# Altium PCB PCB.PcbDoc
Units mm, origin at the board's own origin, x right, y up, seen from the top; angles counter-clockwise.
Board outline 96 x 46 mm, 2 copper layers (Top Layer, Bottom Layer); 22 components, 41 nets, 144 pads, 3 vias.
Unrouted connection lines stored in the file: 2.
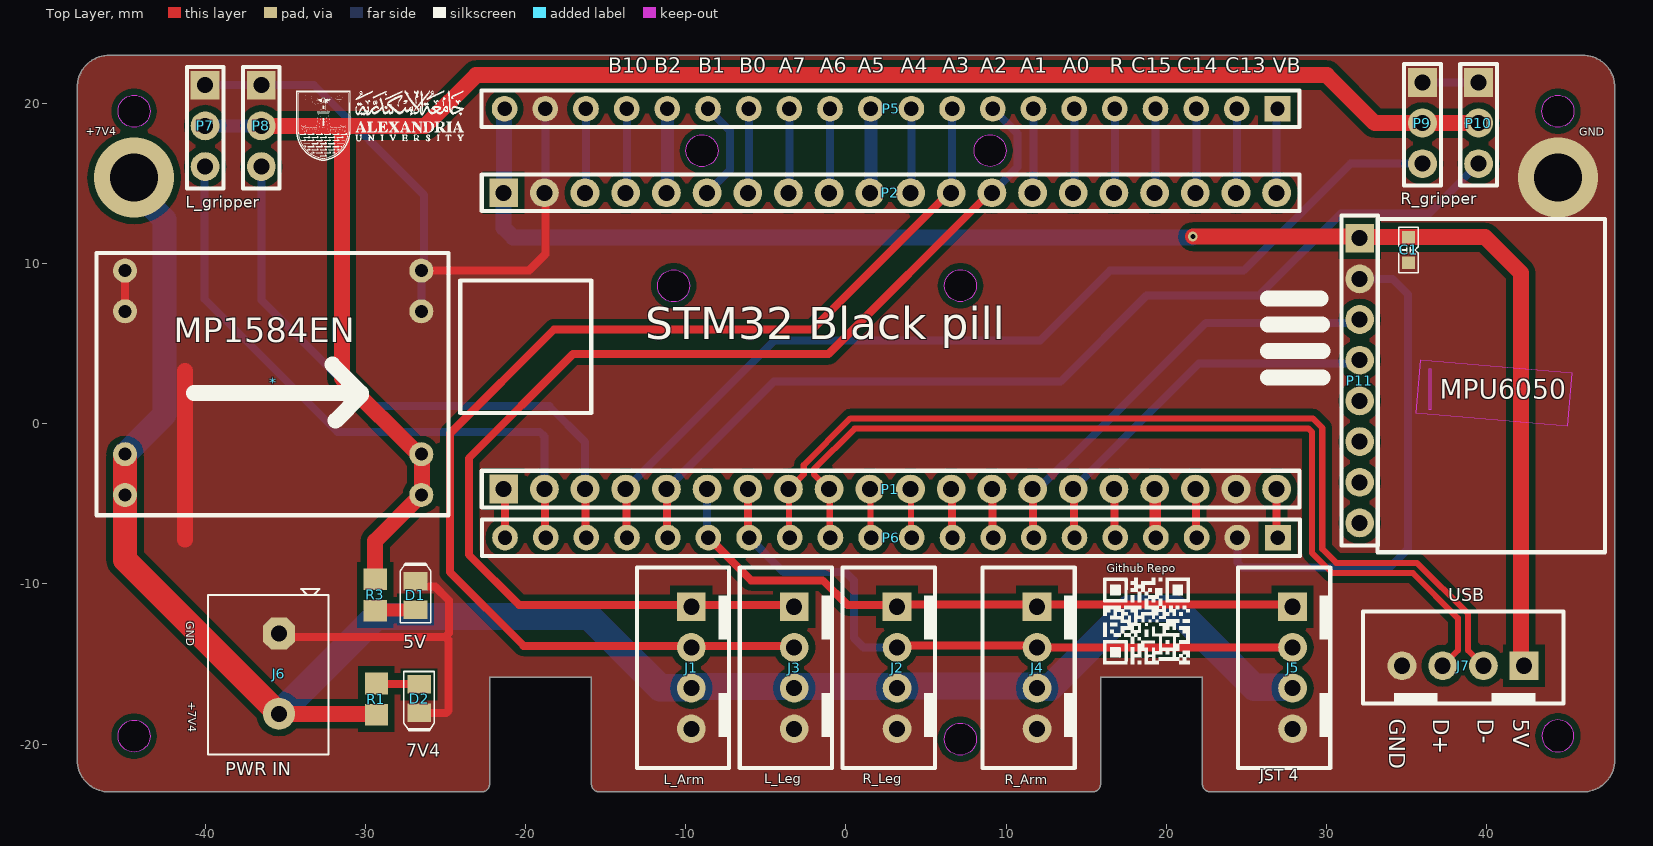
[diagram p0: Top Layer view]
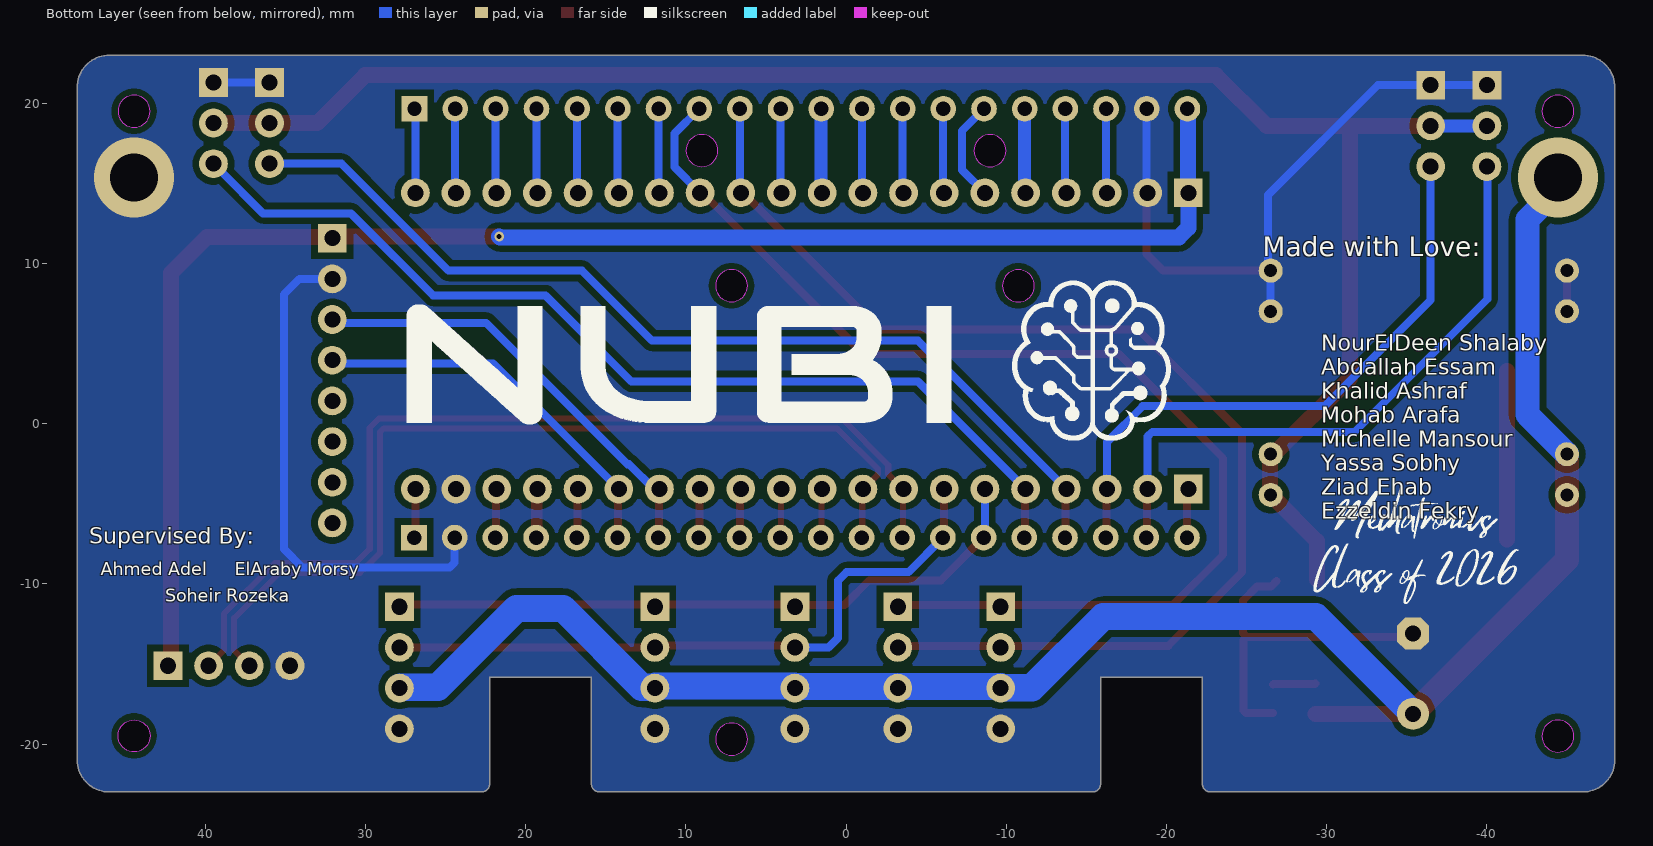
[diagram p1: Bottom Layer view, seen from below]
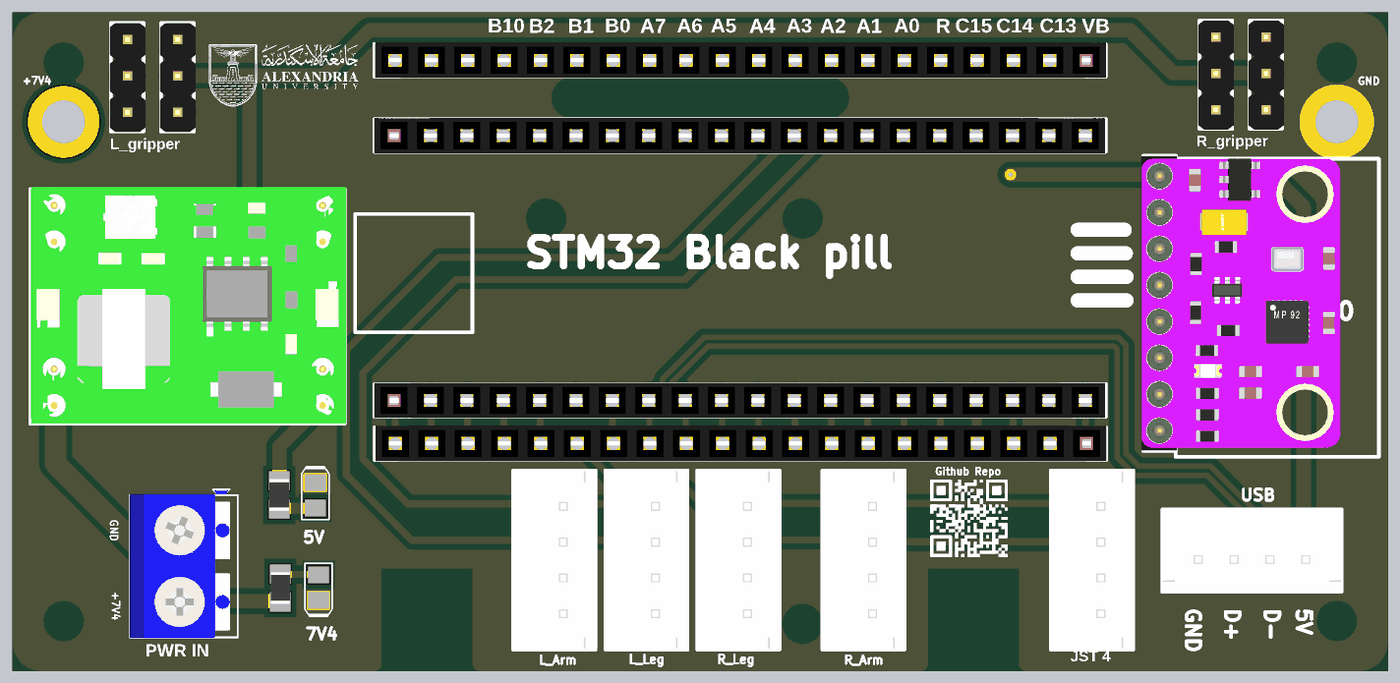
[diagram p2: 3D render of the assembled board from above, using the file's embedded part models]

## Layer stack, top to bottom
Top Solder: solder mask 0.0102, Solder Resist, Dk 3.5
Top Layer: signal copper 0.0356
Dielectric 1: dielectric 0.32, FR-4, Dk 4.8
Bottom Layer: signal copper 0.0356
Bottom Solder: solder mask 0.0102, Solder Resist, Dk 3.5

## Board outline
-45.994,-22.994 -22.743,-22.994 ccw(c-22.743,-22.494) -22.243,-22.494 -22.243,-15.834 -15.89,-15.834 -15.89,-22.494 ccw(c-15.39,-22.494) -15.39,-22.994 15.402,-22.994 ccw(c15.402,-22.494) 15.902,-22.494 15.902,-15.834 22.256,-15.834 22.256,-22.494 ccw(c22.756,-22.494) 22.756,-22.994 46.006,-22.994 ccw(c46.006,-20.994) 48.006,-20.994 48.006,21.006 ccw(c46.006,21.006) 46.006,23.006 -45.994,23.006 ccw(c-45.994,21.006) -47.994,21.006 -47.994,-20.994 ccw(c-45.994,-20.994)
cut-out: 9,16.053 cw(c9,17.053) 8,17.053 cw(c9,17.053) 9,18.053 cw(c9,17.053) 10,17.053 cw(c9,17.053)
cut-out: -8.985,16.043 cw(c-8.985,17.043) -9.985,17.043 cw(c-8.985,17.043) -8.985,18.043 cw(c-8.985,17.043) -7.985,17.043 cw(c-8.985,17.043)
cut-out: 7.146,-20.701 cw(c7.146,-19.701) 6.146,-19.701 cw(c7.146,-19.701) 7.146,-18.701 cw(c7.146,-19.701) 8.146,-19.701 cw(c7.146,-19.701)
cut-out: 7.153,7.614 cw(c7.153,8.614) 6.153,8.614 cw(c7.153,8.614) 7.153,9.614 cw(c7.153,8.614) 8.153,8.614 cw(c7.153,8.614)
cut-out: -10.754,7.611 cw(c-10.754,8.611) -11.754,8.611 cw(c-10.754,8.611) -10.754,9.611 cw(c-10.754,8.611) -9.754,8.611 cw(c-10.754,8.611)
cut-out: 44.456,18.506 cw(c44.456,19.506) 43.456,19.506 cw(c44.456,19.506) 44.456,20.506 cw(c44.456,19.506) 45.456,19.506 cw(c44.456,19.506)
cut-out: -44.444,-20.508 cw(c-44.444,-19.508) -45.444,-19.508 cw(c-44.444,-19.508) -44.444,-18.508 cw(c-44.444,-19.508) -43.444,-19.508 cw(c-44.444,-19.508)
cut-out: 43.456,-19.494 ccw(c44.456,-19.494) 44.456,-20.494 ccw(c44.456,-19.494) 45.456,-19.494 ccw(c44.456,-19.494) 44.456,-18.494 ccw(c44.456,-19.494)
cut-out: -44.444,18.506 cw(c-44.444,19.506) -45.444,19.506 cw(c-44.444,19.506) -44.444,20.506 cw(c-44.444,19.506) -43.444,19.506 cw(c-44.444,19.506)

## Design rules (kind name [scope] priority, off if disabled: settings)
Clearance [All] p1: gap=0.4 ignorepadtopadclearanceinfootprint=FALSE except(0.254: Arc-Arc Arc-Track Track-Track)
DiffPairsRouting [All] p1: maxlimit=0.254 minlimit=0.254 mostfreqgap=0.254 toplayer_minwidth=0.381 toplayer_maxwidth=0.381 toplayer_prefwidth=0.381 bottomlayer_minwidth=0.381 bottomlayer_maxwidth=0.381 bottomlayer_prefwidth=0.381 maxuncoupledlength=12.7
HoleSize [All] p1: absolutevalues=TRUE maxlimit=3 minlimit=0.025 maxpercent=80.000 minpercent=20.000
MinimumSolderMaskSliver [All] p1: minsoldermaskwidth=0.01
PlaneClearance [All] p1: clearance=0.8
PlaneConnect [All] p1: planeconnectstyle=Direct reliefexpansion=0.508 reliefentries=4 reliefconductorwidth=0.254 reliefairgap=0.254
PolygonConnect [All] p1: connectstyle=Direct reliefconductorwidth=0.6 reliefentries=4 polygonreliefangle="90 Angle" airgapwidth=0.25
RoutingVias [All] p1: holewidth=0.711 width=1.27 viastyle="Through Hole" minholewidth=0.711 minwidth=1.27 maxholewidth=0.711 maxwidth=1.27
SilkToSilkClearance [All] p1: silktosilkclearance=0.01
SilkToSolderMaskClearance [IsPad] p1: minsilkscreentomaskgap=0.01 clearancetoexposedcopper=TRUE
SolderMaskExpansion [All] p1: expansion=0.102 istentingtop=FALSE
SupplyNets "Schematic Supply Nets_3" [InNet('3V3')] p1: voltage=0.000
SupplyNets "Schematic Supply Nets_5" [InNet('STM_PWR')] p2: voltage=0.000
SupplyNets "Schematic Supply Nets" [InNet('GND')] p3: voltage=0.000
SupplyNets "Schematic Supply Nets_2" [InNet('+5V')] p4: voltage=0.000
SupplyNets "Schematic Supply Nets_1" [InNet('+7.4V')] p5: voltage=0.000
Width [All] p1: maxlimit=2 minlimit=0.2 preferedwidth=0.5 minimp=50.000000 maximp=50.000000 favimp=50.000000
23 further rules are at their usual default settings.

## Classes and differential pairs
differential pair USB: +USB_P -USB_N

## Components (designator, comment, footprint, x,y, rotation, side; value= is the part's Value field where it differs from the comment)
* "MP1584EN_Buck_stepdown" MP1584EN_MODULE -45.009,-4.445 r0 top
C1 "" "CAP Ceramic SMD 0603" 35.128,10.846 r270 top value=100nF
D1 "5V" "LED SMD 0805R" -26.873,-10.719 r90 top
D2 "7V4" "LED SMD 0805R" -26.645,-17.17 r270 top
J1 "JST 4" XH4/2.54mm/180 -9.652,-11.43 r270 top
J2 "JST 4" XH4/2.54mm/180 3.2,-11.43 r270 top
J3 "JST 4" XH4/2.54mm/180 -3.226,-11.43 r270 top
J4 "JST 4" XH4/2.54mm/180 11.938,-11.43 r270 top
J5 "JST 4" XH4/2.54mm/180 27.889,-11.43 r270 top
J6 "PWR IN" "Connector screw terminal Block TH 1x2 5.0" -35.396,-13.111 r0 top
J7 "JST 4" XH4/2.54mm/180 42.342,-15.113 r180 top
P1 "Connector Pinheader 1x20" "Header F 2.54X20"#1 2.763,-4.083 r0 top locked
P2 "Connector Pinheader 1x20" "Header F 2.54X20"#1 2.763,14.417 r0 top locked
P5 "Connector Pinheader 1x20" "Header F 2.54X20"#2 2.819,19.66 r180 top
P6 "Connector Pinheader 1x20" "Header F 2.54X20"#2 2.845,-7.112 r180 top
P7 "L_gripper" "Header 2.54X3" -40.005,18.593 r270 top
P8 "Connector Pinheader 1x3" "Header 2.54X3" -36.5,18.593 r270 top
P9 "R_gripper" "Header 2.54X3" 36,18.771 r270 top
P10 "Connector Pinheader 1x3" "Header 2.54X3" 39.5,18.771 r270 top
P11 "MPU6050 (GY-521 Module)" "MPU6050 (GY-521 Module)" 32.08,11.582 r270 top
R1 "Resistor 1k +/-1% 0805 125 mW" RESC2013X70X40ML20T20 -29.312,-17.196 r90 top value=1k
R3 "Resistor 1k +/-1% 0805 125 mW" RESC2013X70X40ML20T20 -29.388,-10.693 r270 top value=1k

## Footprints (in the part's own frame and the unit in brackets; to place one, negate y for a bottom-side part, rotate by r counter-clockwise, add the part's x,y. Pads: shape width x height; smd on the part's side, far side on the other; paste and mask are expansions set on the pad)
"CAP Ceramic SMD 0603" [mm]
  rect 0.8x0.8 smd: 1(-0.8,0) 2(0.8,0)
  silkscreen extent -1.41,-0.6 1.41,0.6, body extent -0.8,-0.4 0.8,0.4, height 0.3
"Connector screw terminal Block TH 1x2 5.0" [mm]
  oct 2x2 hole 1: 1(0,0)
  round 2 hole 1: 2(0,-5)
  silkscreen extent -4.42,-7.54 3.1,2.79, body extent -4.44,-7.56 3.16,2.73, height 10.14
"Header 2.54X3" [mm]
  rect 1.8x1.8 hole 1: 1(-2.54,0)
  round 1.8 hole 1: 2(0,0) 3(2.54,0)
  silkscreen extent -3.68,-1.14 3.9,1.14, body extent -3.68,-1.23 3.94,1.27, height 8.3
"Header F 2.54X20"#1 [mm]
  rect 1.8x1.8 hole 1: 1(-24.13,0)
  round 1.8 hole 1: 2(-21.59,0) 3(-19.05,0) 4(-16.51,0) 5(-13.97,0) 6(-11.43,0) 7(-8.89,0) 8(-6.35,0) 9(-3.81,0) 10(-1.27,0) 11(1.27,0) 12(3.81,0) 13(6.35,0) 14(8.89,0) 15(11.43,0) 16(13.97,0) 17(16.51,0) 18(19.05,0) 19(21.59,0) 20(24.13,0)
  silkscreen extent -25.5,-1.14 25.57,1.14, body extent -25.53,-1.26 25.52,1.24, height 8.6
"Header F 2.54X20"#2 [mm]
  rect 1.6x1.6 hole 0.9: 1(-24.13,0)
  round 1.6 hole 0.9: 2(-21.59,0) 3(-19.05,0) 4(-16.51,0) 5(-13.97,0) 6(-11.43,0) 7(-8.89,0) 8(-6.35,0) 9(-3.81,0) 10(-1.27,0) 11(1.27,0) 12(3.81,0) 13(6.35,0) 14(8.89,0) 15(11.43,0) 16(13.97,0) 17(16.51,0) 18(19.05,0) 19(21.59,0) 20(24.13,0)
  silkscreen extent -25.5,-1.14 25.57,1.14, body extent -25.53,-1.26 25.52,1.24, height 8.6
"LED SMD 0805R" [mm]
  rect 1.16x1.47 smd: 1(-0.89,0) 2(0.89,0)
  silkscreen extent -1.7,-0.95 2,0.95, body extent -1,-0.63 1,0.62, height 0.8
MP1584EN_MODULE [mm]
  round 1.5 hole 0.813: 1(0,0) 1(0,2.54) 2(0,11.46) 2(0,14) 3(18.5,0) 3(18.5,2.54) 4(18.5,11.46) 4(18.5,14)
  silkscreen extent -1.78,-1.27 20.19,15.11, body extent -1.73,-1.27 20.27,15.24, height 12
"MPU6050 (GY-521 Module)" [mm]
  rect 1.8x1.8 hole 1: 1(0,0)
  round 1.8 hole 1: 2(2.54,0) 3(5.08,0) 4(7.62,0) 5(10.16,0) 6(12.7,0) 7(15.24,0) 8(17.78,0)
  silkscreen extent -1.41,-1.14 19.2,1.14, body extent -1.4,-1.27 19.17,12.63, height 14.87
RESC2013X70X40ML20T20 [mm] "Chip Resistor, 2-Leads, Body 2.2x1.35mm, IPC Low Density"
  rect 1.35x1.45 smd: 1(-0.975,0) 2(0.975,0)
  body extent -1.1,-0.67 1.1,0.67, height 0.7
XH4/2.54mm/180 [mm]
  rect 1.8x1.8 hole 1: 1(0,0)
  round 1.8 hole 1: 2(2.54,0) 3(5.08,0) 4(7.62,0)
  silkscreen extent -2.45,-3.4 10.07,2.35, body extent -2.39,-3.3 10.01,2.45, height 7

## Part data
C1: library part "CAP 0603 100nF 100V X7R 10%", "100V 100nF X7R ±10% 0603 Multilayer Ceramic Capacitors MLCC - SMD/SMT ROHS", Manufacturer=Yageo, Manufacturer Part Number=CC0603KRX7R0BB104, Supplier Part Number=C113803, Temperature Characteristics Code=X7R, Voltage=100V, Supplier=LCSC
D1 D2: library part "LED 0805 Red", "red 0805 Light Emitting Diodes (LED) ROHS", Manufacturer="FOSHAN Nationstar Optoelectronics", Manufacturer Part Number=NCD0805R1, Supplier Part Number=C84256, Category=Uncategorized, Pricing 1="50=0.01160, 500=0.00900, 3000=0.00780, 6000=0.00700, 24000=0.00660, 51000=0.00640 (USD)", RoHS=No, Stock 1=1189900, Supplier=LCSC
J1 J2 J3 J4 J5 J7: "MaleHeader 4x1"
J6: library part "connector screw terminal 1x2", "691214110002 - Wire-To-Board Terminal Block, 3.5 mm, 2 Positions, 24 AWG, 16 AWG, 1.5 mm², Screw", Color=Blue,Green, Current=10A, Manufacturer="Wurth Electronics", Manufacturer Part Number=691214110002, Max Operating Temperature=105°C, Min Operating Temperature=-40°C, Package Quantity=1400, Supplier Part Number 1=732-2747-ND, Voltage=300V, Category="Terminal Blocks", ComponentLink1Description=https://datasheet.ciiva.com/824/6912141100xx-824001.pdf?src-supplier=Digi-Key, ComponentLink1URL=https://datasheet.ciiva.com/824/6912141100xx-824001.pdf?src-supplier=Digi-Key, ComponentLink2Description=https://datasheet.ciiva.com/48693/001088618-da-01-en-wr-tbl-terminal-block2141-691214110002-48693195.pdf?src-supplier=Conrad, ComponentLink2URL=https://datasheet.ciiva.com/48693/001088618-da-01-en-wr-tbl-terminal-block2141-691214110002-48693195.pdf?src-supplier=Conrad, Contact Material=Brass, Contact Plating=Brass,Tin, Current Rating=10A, Height=12.2mm, Housing Material=PA66, Length=7.4mm, Mount="Through Hole", Number of Contacts=2, Number of Levels=1, Number of Positions Per Level=2, Packaging=Bulk, Pitch=0.138inch, Plating=Brass,Steel, Pricing 1="1=0.83000, 10=0.73900, 50=0.63800, 100=0.57100, 500=0.53800, 1400=0.50400 (USD)", REACH SVHC=Unknown, RoHS=Yes, RoHS Compliant=Yes, Series="WR-TBL Series 2141", Stock 1=5949, Stripping Length=-6mm, Supplier 1=Digi-Key, Termination=Screw, Voltage Rating=300V, Width=7.9mm, Wire Gauge (Max)=24AWG, Wire Gauge (Min)=16AWG, Wire/Cable Gauge=24AWG
P1 P2 P5 P6: "Header_20x1"
P7 P9: library part "Connector Pinheader 1x3", "Header_3x1"
P8 P10: "Header_3x1"
  P10: ComponentLink1Description="New link"
R1 R3: library part CMP-009-00010-5, "Chip Resistor, 1 KOhm, +/- 1%, 0.125 W, -55 to 155 degC, 0805 (2013 Metric)", Case/Package=0805, Max Operating Temperature=155°C, Min Operating Temperature=-55°C, Power=125mW, Tolerance=1%, Voltage Rating=150V, Mounting Technology=SM, Pins=2, RoHS Compliant=True

## Via types
v1: diameter 5, hole 3, Top Layer to Bottom Layer, 2 vias
v2: diameter 0.6, hole 0.3, Top Layer to Bottom Layer, 1 vias

## Nets (pads, with @x,y where several pads share a name; then routed paths per layer and width w, separated by ;. In a path a pad name is that pad's centre, name@x,y a point inside that pad or via, vN(x,y) a via of type N, cw(c..) or ccw(c..) an arc to the next point about the centre after c; other vN are vias at no path point)
3V3: P1.20 P2.3 P5.18 P6.1 | length 8.3
  Top Layer w0.5: P1.20 26.893,-7.031 P6.1
  Bottom Layer w0.5: P2.3 -16.22,14.483 -16.22,19.649 P5.18
+5V: *.3 P7.2 P8.2 P9.2 P10.2 R3.1 | length 113.6
  Top Layer w1: P8.2 -36.127,18.593 -31.566,18.593 ; R3.1 -29.388,-7.324 *.3@-26.509,-4.445 ; *.3@-26.615,-2.011 -31.465,2.839 -31.465,18.491 -31.566,18.593 ; *.3@-26.509,-1.905 -26.509,-2.117 -26.467,-2.159 *.3@-26.467,-4.445 ; P10.2@39,18.771 P9.2 33.02,18.771 30.023,21.768 -23.089,21.768 -26.264,18.593 -31.566,18.593
  Bottom Layer w0.8: P7.2 P8.2@-36.127,18.593
+7.4V: *.1 J1.3 J2.3 J3.3 J4.3 J5.3 J6.2 R1.1 | length 116.4
  Top Layer w1: J6.2 R1.1@-29.306,-18.111
  Top Layer w1.5: *.1@-45.009,-2.032 -45.009,-4.445 -45.009,-8.498 J6.2
  Bottom Layer w1.5: *.1@-45.009,-1.905 -42.545,0.559 -42.545,12.738 -44.444,14.637 v1@-44.444,14.808
  Bottom Layer w1.7: J6.2 -29.325,-12.04 -16.053,-12.04 -11.602,-16.491 -9.679,-16.491 J1.3@-9.652,-16.464 ; J1.3@-9.652,-16.408 -3.226,-16.408 3.2,-16.408 3.226,-16.383 J4.3@11.913,-16.383 ; J4.3 11.995,-16.453 12.757,-16.453 17.678,-11.532 20.574,-11.532 25.495,-16.453 27.832,-16.453 J5.3
  other v1: -44.444,15.367
A0: P2.15 P5.6 | length 5.3
  Bottom Layer w0.5: P2.15 14.26,14.483 14.26,19.649 P5.6
A1: P2.14 P5.7 | length 5.3
  Bottom Layer w0.5: P2.14 11.709,14.473 P5.7
A2_TX2: J1.1 J3.1 P2.13 P5.8 | length 73.7
  Top Layer w0.5: J3.1@-3.226,-11.328 -9.652,-11.328 -20.396,-11.328 -23.546,-8.179 -23.546,-2.159 -17.043,4.343 -1.088,4.343 8.986,14.417 P2.13
  Bottom Layer w0.5: P2.13 10.719,16.023 10.719,18.11 P5.8
A3_RX2: J1.2 J3.2 P2.12 P5.9 | length 74.8
  Top Layer w0.5: J3.2@-3.226,-13.868 -9.652,-13.868 -20.117,-13.868 -24.714,-9.271 -24.714,-0.607 -18.215,5.893 -2.078,5.893 6.446,14.417 P2.12
  Bottom Layer w0.5: P2.12 6.64,14.483 6.64,19.649 P5.9
A4: P2.11 P5.10 | length 5.3
  Bottom Layer w0.5: P2.11 4.1,14.483 4.1,19.649 P5.10
A5: P2.10 P5.11 | length 5.3
  Bottom Layer w0.8: P2.10 1.56,14.483 1.56,19.649 P5.11
A6: P2.9 P5.12 | length 5.3
  Bottom Layer w0.5: P2.9 -0.98,14.483 -0.98,19.649 P5.12
A7: P2.8 P5.13 | length 5.3
  Bottom Layer w0.5: P2.8 -3.52,14.483 -3.52,19.649 P5.13
A8: P1.5 P6.16 P10.3 | length 62
  Top Layer w0.5: P1.5 -11.166,-4.123 -11.166,-7.071 P6.16
  Bottom Layer w0.5: P1.5 -4.482,2.642 13.411,2.642 18.771,8.001 25.78,8.001 30.53,12.752 30.911,13.132 36.402,13.132 39.075,15.806 39.075,16.155 P10.3@39,16.231
A9_TX1: J2.1 J4.1 J5.1 P1.6 P6.15 | length 41.4
  Top Layer w0.5: P6.15 -5.919,-9.778 -1.448,-9.778 0.102,-11.328 J2.1@3.2,-11.328 ; J2.1@3.251,-11.278 11.938,-11.278 27.737,-11.278 J5.1
  Bottom Layer w0.5: P1.6 -8.667,-7.031 P6.15 ; J2.1@3.2,-11.328 J2.1@3.251,-11.278
A10_RX1: J2.2 J4.2 J5.2 P1.7 P6.14 | length 42.1
  Top Layer w0.5: P1.7 -6.127,-7.031 P6.14 ; J2.2 3.327,-13.843 11.913,-13.843 11.938,-13.818 12.09,-13.97 J5.2
  Bottom Layer w0.5: P6.14 -3.886,-9.271 -0.025,-9.271 0.508,-9.804 0.508,-13.386 1.092,-13.97 J2.2
A15: P1.10 P6.11 | length 3.1
  Top Layer w0.381: P1.10 1.534,-4.123 1.534,-7.071 P6.11
B0: P2.7 P5.14 | length 5.3
  Bottom Layer w0.5: P2.7 -6.06,14.483 -6.06,19.649 P5.14
B1: P2.6 P5.15 | length 6.4
  Bottom Layer w0.5: P2.6 -7.239,15.845 -7.239,18.288 P5.15
B2: P2.5 P5.16 | length 5.3
  Bottom Layer w0.8: P2.5 -11.14,14.483 -11.14,19.649 P5.16
B3: P1.11 P6.10 | length 3.1
  Top Layer w0.381: P1.11 4.074,-4.123 4.074,-7.071 P6.10
B4: P1.12 P6.9 | length 3.1
  Top Layer w0.5: P1.12 6.614,-4.123 6.614,-7.071 P6.9
B5: P1.13 P6.8 | length 3.1
  Top Layer w0.5: P1.13 9.154,-4.123 9.154,-7.071 P6.8
B6: P1.14 P6.7 P11.3 | length 27.9
  Top Layer w0.5: P1.14 11.694,-4.123 11.694,-7.071 P6.7
  Bottom Layer w0.5: P1.14 12.001,-4.083 13.551,-2.533 13.647,-2.533 22.479,6.299 31.877,6.299 P11.3
B7: P1.15 P6.6 P11.4 | length 24.3
  Top Layer w0.5: P1.15 14.234,-4.123 14.234,-7.071 P6.6
  Bottom Layer w0.5: P1.15 22.035,3.759 31.877,3.759 P11.4
B8: P1.16 P6.5 | length 3.1
  Top Layer w0.5: P1.16 16.774,-4.123 16.774,-7.071 P6.5
B9: P1.17 P6.4 | length 3.1
  Top Layer w0.7: P1.17 19.314,-4.123 19.314,-7.071 P6.4
B10: P2.4 P5.17 | length 5.3
  Bottom Layer w0.5: P2.4 -13.68,14.483 -13.68,19.649 P5.17
B12: P1.1 P6.20 | length 3.1
  Top Layer w0.5: P1.1 -21.285,-4.164 P6.20
B13: P1.2 P6.19 P7.3 | length 39.4
  Top Layer w0.5: P1.2 -18.786,-4.123 -18.786,-7.071 P6.19
  Bottom Layer w0.5: P7.3 -40.03,16.027 -40.03,7.772 -31.753,-0.505 -19.119,-0.505 -18.827,-0.798 P1.2
B14: P1.3 P6.18 P8.3 | length 38.2
  Top Layer w0.5: P1.3 -16.246,-4.123 -16.246,-7.071 P6.18
  Bottom Layer w0.5: P8.3 -36.5,7.722 -29.87,1.092 -18.517,1.092 -16.287,-1.138 P1.3
B15: P1.4 P6.17 P9.3 | length 61.2
  Top Layer w0.5: P1.4 -13.706,-4.123 -13.706,-7.071 P6.17
  Bottom Layer w0.5: P1.4 -4.482,5.182 12.116,5.182 16.485,9.55 24.816,9.55 31.496,16.231 P9.3
C13: P2.19 P5.2 | length 5.3
  Bottom Layer w0.5: P2.19 24.42,14.483 24.42,19.649 P5.2
C14: P2.18 P5.3 | length 5.3
  Bottom Layer w0.5: P2.18 21.88,14.483 21.88,19.649 P5.3
C15: P2.17 P5.4 | length 5.3
  Bottom Layer w0.5: P2.17 19.34,14.483 19.34,19.649 P5.4
GND: *.2 *.4 C1.2 D1.2 D2.2 J1.4 J2.4 J3.4 J4.4 J5.4 J6.1 J7.4 P1.19 P2.2 P5.19 P6.2 P7.1 P8.1 P9.1 P10.1 P11.2 | length 111.5
  Top Layer w0.5: *.2@-45.009,9.595 -45.009,9.555 -45.009,7.015 -45.009,7.01 *.2@-44.856,6.858 ; J6.1 -35.197,-13.31 -25.019,-13.31 ; D1.2 -26.543,-10.159 -25.66,-10.159 -24.79,-11.028 -24.79,-13.081 -25.019,-13.31 ; D2.2 -24.969,-18.06 -24.816,-17.907 -24.816,-13.513 -25.019,-13.31 ; *.4@-26.509,9.555 -19.782,9.555 -18.75,10.587 P2.2@-18.75,14.341
  Top Layer w1: -41.275,-7.232 -41.275,3.277
  Bottom Layer w0.5: P7.1 P8.1 -33.198,21.133 -26.34,14.275 *.4@-26.34,9.555 ; *.4@-26.509,7.015 *.4@-26.509,9.555 ; P5.19 -18.76,19.649 -18.76,14.483 P2.2 P2.2@-18.75,14.341 ; P6.2 24.435,-8.662 24.765,-8.992 33.934,-8.992 35.103,-7.823 35.103,8.077 34.138,9.042 P11.2 ; P9.1 P10.1@39,21.311
  other v1: 44.456,15.367
NetD1_1: D1.1 R3.2 | length 2.5
  Top Layer w0.8: R3.2 -29.358,-11.639 -26.903,-11.639 D1.1
NetD2_1: D2.1 R1.2 | length 2.7
  Top Layer w0.5: R1.2 -29.282,-16.251 -26.674,-16.251 D2.1
R: P2.16 P5.5 | length 5.3
  Bottom Layer w0.5: P2.16 16.8,14.483 16.8,19.65 P5.5
STM_PWR: C1.1 J7.1 P1.18 P2.1 P5.20 P6.3 P11.1 | length 99.8
  Top Layer w0.5: P1.18 21.854,-4.123 21.854,-7.071 P6.3
  Top Layer w1: v2(21.666,11.684) 31.979,11.684 P11.1 ; P11.1@32.144,11.646 39.91,11.646 42.139,9.418 42.139,-14.91 J7.1
  Bottom Layer w1: P2.1 -21.367,12.219 -20.781,11.633 21.615,11.633 v2(21.666,11.684) ; P2.1@-21.349,14.417 P5.20@-21.349,19.621
USB_N: J7.2 P1.8 P6.13 | length 60.8
  Top Layer w0.381: P6.13 -3.546,-7.071 -3.546,-4.123 P1.8 -3.557,-4.083 -2.634,-3.16 -2.634,-2.581 0.278,0.33 29.148,0.33 29.743,-0.265 29.743,-7.814 30.616,-8.687 35.655,-8.687 38.849,-11.881 38.849,-14.16 J7.2
USB_P: J7.3 P1.9 P6.12 | length 58.7
  Top Layer w0.381: P6.12 -1.006,-7.071 -1.006,-4.123 P1.9 -1.077,-4.083 -1.999,-3.16 -1.999,-2.844 0.541,-0.305 28.885,-0.305 29.108,-0.528 29.108,-8.077 30.353,-9.322 35.392,-9.322 38.214,-12.144 38.214,-14.16 J7.3
VB: P2.20 P5.1 | length 5.3
  Bottom Layer w0.5: P2.20 26.893,19.604 P5.1
pads on no net: P11.5 P11.6 P11.7 P11.8

## Polygon pours and split planes (outlines as drawn)
GND on Top Layer "NONET_L04_P-001" (solid, remove dead copper, pour order 0): -45.994,-22.994 -22.743,-22.994 ccw(c-22.743,-22.494) -22.243,-22.494 -22.243,-15.834 -15.89,-15.834 -15.89,-22.494 ccw(c-15.39,-22.494) -15.39,-22.994 15.402,-22.994 ccw(c15.402,-22.494) 15.902,-22.494 15.902,-15.834 22.256,-15.834 22.256,-22.494 ccw(c22.756,-22.494) 22.756,-22.994 46.006,-22.994 ccw(c46.006,-20.994) 48.006,-20.994 48.006,21.006 ccw(c46.006,21.006) 46.006,23.006 -45.994,23.006 ccw(c-45.994,21.006) -47.994,21.006 -47.994,-20.994 ccw(c-45.994,-20.994)
GND on Bottom Layer "NONET_L04_P-001" (solid, remove dead copper, pour order 1): -45.994,-22.994 -22.743,-22.994 ccw(c-22.743,-22.494) -22.243,-22.494 -22.243,-15.834 -15.89,-15.834 -15.89,-22.494 ccw(c-15.39,-22.494) -15.39,-22.994 15.402,-22.994 ccw(c15.402,-22.494) 15.902,-22.494 15.902,-15.834 22.256,-15.834 22.256,-22.494 ccw(c22.756,-22.494) 22.756,-22.994 46.006,-22.994 ccw(c46.006,-20.994) 48.006,-20.994 48.006,21.006 ccw(c46.006,21.006) 46.006,23.006 -45.994,23.006 ccw(c-45.994,21.006) -47.994,21.006 -47.994,-20.994 ccw(c-45.994,-20.994)

## Keep-outs
Top Layer:
  region: 35.59,0.692 45.08,-0.121 45.36,3.143 35.87,3.957
  rectangle: 36.398,0.889 36.551,3.404

## Silkscreen, mask and mechanical layers (free items; w line width, h text height)
Top Overlay:
  drawing of 121 lines, arcs and shapes, not listed
  text "B10" at -14.834,21.609 h1.6
  text "B2" at -11.963,21.59 h1.6
  text "B1" at -9.22,21.59 h1.6
  text "B0" at -6.655,21.609 h1.6
  text "A7" at -4.191,21.59 h1.6
  text "A6" at -1.626,21.609 h1.6
  text "A5" at 0.737,21.609 h1.6
  text "A4" at 3.429,21.59 h1.6
  text "A3" at 6.02,21.609 h1.6
  text "A2" at 8.382,21.59 h1.6
  text "A1" at 10.897,21.59 h1.6
  text "A0" at 13.538,21.609 h1.6
  text "R" at 16.459,21.59 h1.6
  text "C15" at 17.805,21.609 h1.6
  text "C14" at 20.676,21.608 h1.6
  text "C13" at 23.698,21.609 h1.6
  text "VB" at 26.645,21.59 h1.6
  text "+7V4" at -47.45,18.005 h0.5
  text "GND" at 45.793,17.98 h0.5
  text "STM32 Black pill" at -12.53,5.281 h2
  text "MPU6050" at 37.079,1.57 h1.2
  text "Github Repo" at 16.278,-9.285 h0.5
  text "USB" at 37.614,-11.078 h0.8
  text "GND" at -41.175,-12.343 h0.5 r270
  text "+7V4" at -41.048,-17.372 h0.5 r270
  text "GND" at 33.93,-18.436 h1 r270
  text "D+" at 36.673,-18.436 h1 r270
  text "D-" at 39.441,-18.436 h1 r270
  text "5V" at 41.677,-18.436 h1 r270
  text "L_Leg" at -5.109,-22.46 h0.6
  text "R_Leg" at 1.064,-22.46 h0.6
  text "L_Arm" at -11.382,-22.51 h0.6
  text "R_Arm" at 9.928,-22.51 h0.6
Bottom Overlay:
  drawing of 25 lines, arcs and shapes, not listed
  text "Made with Love:" at -26.01,10.439 h1.2
  text "NourElDeen Shalaby / Abdallah Essam / Khalid Ashraf / Mohab Arafa / Michelle Mansour / Yassa Sobhy / Ziad Ehab / Ezzeldin Fekry" at -29.667,-5.935 h1
  text "Supervised By:" at 47.247,-7.493 h1
  text "Ahmed Adel     ElAraby Morsy" at 46.536,-9.465 h0.8
  text "Soheir Rozeka" at 42.497,-11.128 h0.8
Mechanical 1:
  circle w0.013: c-44.444,-19.494 r1
  circle w0.013: c7.156,8.606 r1
  circle w0.013: c-10.744,8.606 r1
  circle w0.013: c-44.444,19.506 r1
  circle w0.013: c44.456,-19.494 r1
  circle w0.013: c44.456,19.506 r1
  circle w0.013: c9.006,17.056 r1
  circle w0.013: c-8.994,17.056 r1
  circle w0.013: c7.156,-19.694 r1
  circle w0.013: c44.456,19.506 r1
  circle w0.013: c-44.444,-19.494 r1
  circle w0.013: c-44.444,19.506 r1
  circle w0.013: c44.456,-19.494 r1
  circle w0.013: c44.456,19.506 r1
  circle w0.013: c-44.444,-19.494 r1
  circle w0.013: c-44.444,19.506 r1
  circle w0.013: c44.456,-19.494 r1
  circle w0.013: c-44.444,19.506 r1
  circle w0.013: c44.456,-19.494 r1
  lines w0.013: -4.007,0.006 0.006,0.006 0.006,8.033 ; -47.994,-20.994 ccw(c-45.994,-20.994) -45.994,-22.994 ; -47.994,-20.994 ccw(c-45.994,-20.994) -45.994,-22.994 ; -47.994,-20.994 -47.994,21.006 ; -47.994,-20.994 -47.994,21.006 ; -47.994,21.006 cw(c-45.994,21.006) -45.994,23.006 ; -47.994,21.006 cw(c-45.994,21.006) -45.994,23.006 ; -45.994,-22.994 -22.743,-22.994 ; -45.994,-22.994 -22.743,-22.994 ; -45.994,23.006 46.006,23.006 ; -45.994,23.006 46.006,23.006 ; -22.743,-22.994 ccw(c-22.743,-22.494) -22.243,-22.494 ; -22.743,-22.994 ccw(c-22.743,-22.494) -22.243,-22.494 ; -22.243,-22.494 -22.243,-15.834 ; -22.243,-22.494 -22.243,-15.834 ; -22.243,-15.834 -15.89,-15.834 ; -22.243,-15.834 -15.89,-15.834 ; -15.89,-22.494 ccw(c-15.39,-22.494) -15.39,-22.994 ; -15.89,-22.494 ccw(c-15.39,-22.494) -15.39,-22.994 ; -15.89,-22.494 -15.89,-15.834 ; -15.89,-22.494 -15.89,-15.834 ; -15.39,-22.994 15.402,-22.994 ; -15.39,-22.994 15.402,-22.994 ; 15.402,-22.994 ccw(c15.402,-22.494) 15.902,-22.494 ; 15.402,-22.994 ccw(c15.402,-22.494) 15.902,-22.494 ; 15.902,-22.494 15.902,-15.834 ; 15.902,-22.494 15.902,-15.834 ; 15.902,-15.834 22.256,-15.834 ; 15.902,-15.834 22.256,-15.834 ; 22.256,-22.494 ccw(c22.756,-22.494) 22.756,-22.994 ; 22.256,-22.494 ccw(c22.756,-22.494) 22.756,-22.994 ; 22.256,-22.494 22.256,-15.834 ; 22.256,-22.494 22.256,-15.834 ; 22.756,-22.994 46.006,-22.994 ; 22.756,-22.994 46.006,-22.994 ; 46.006,-22.994 ccw(c46.006,-20.994) 48.006,-20.994 ; 46.006,-22.994 ccw(c46.006,-20.994) 48.006,-20.994 ; 46.006,23.006 cw(c46.006,21.006) 48.006,21.006 ; 46.006,23.006 cw(c46.006,21.006) 48.006,21.006 ; 48.006,-20.994 48.006,21.006 ; 48.006,-20.994 48.006,21.006

## Text inside footprints (layer, text, board x,y; h text height)
*: Top Overlay "MP1584EN" at -41.961,5.08 h1.52